# Altium PCB PCB.PcbDoc (part 2 of 2)
Units mm, origin at the board's own origin, x right, y up, seen from the top; angles counter-clockwise.
Board outline 181 x 108 mm, 2 copper layers (Top Layer, Bottom Layer), stack 1.571 mm thick; 37 components, 127 nets, 780 pads, 76 vias.
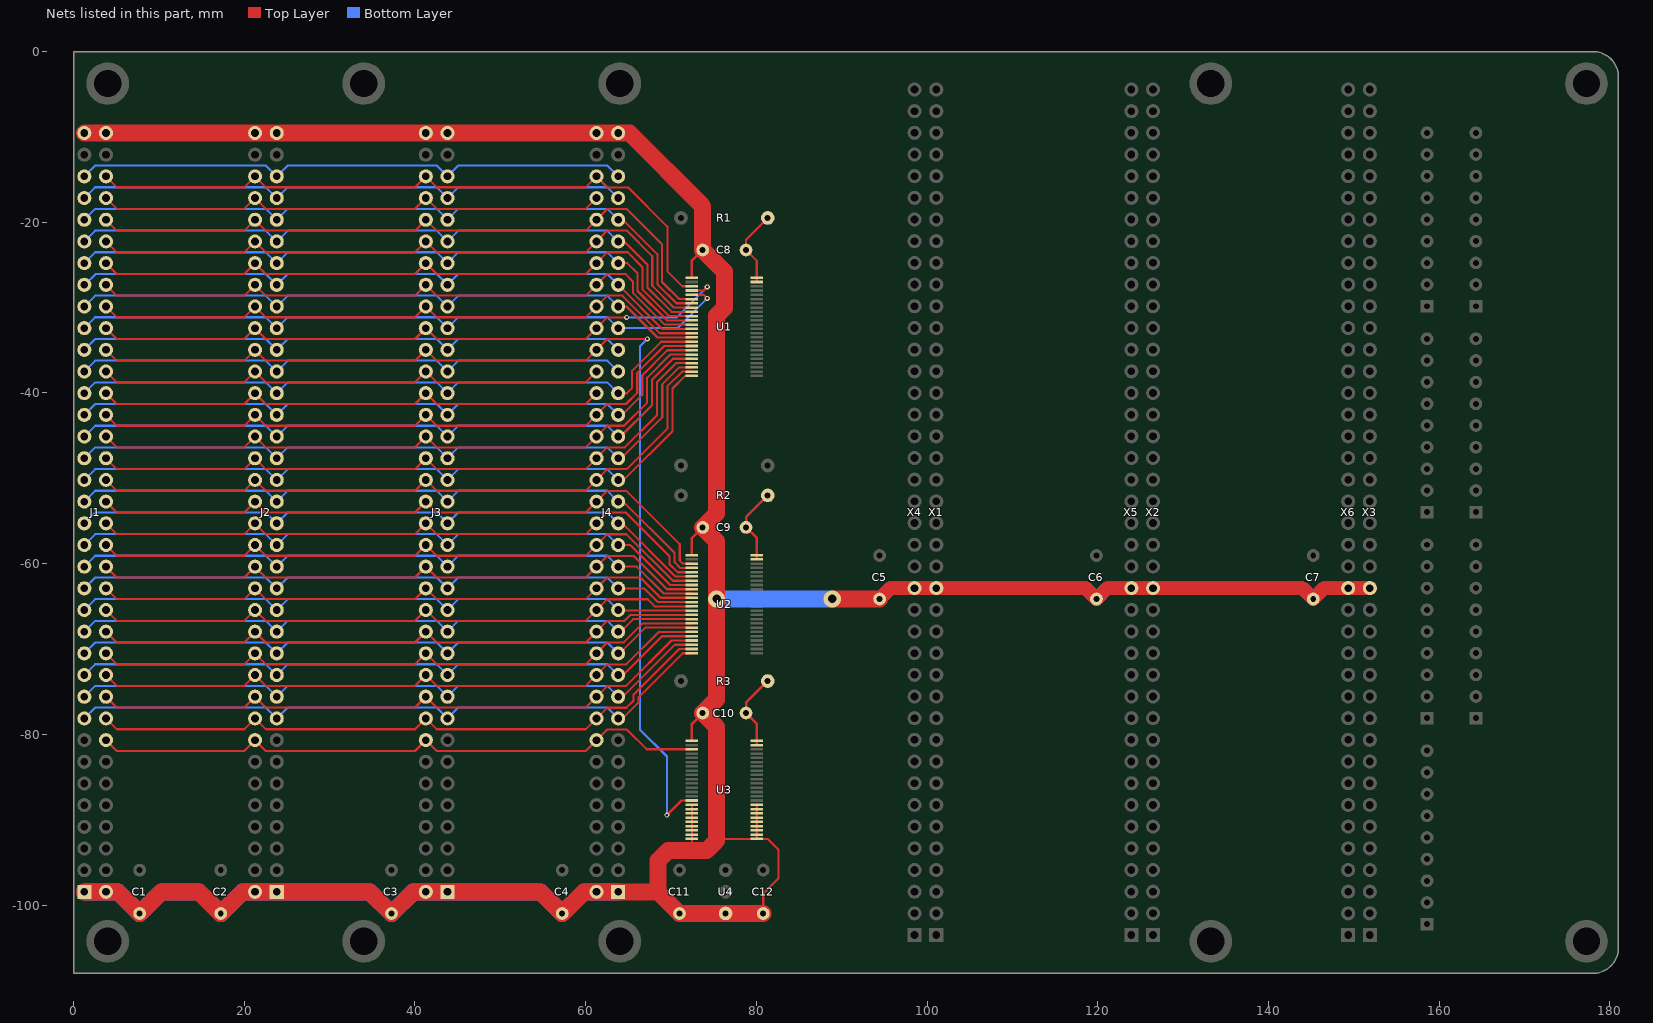
[diagram p2: the nets of this part, all layers, seen from the top]

## Via types
v1: diameter 0.6, hole 0.3, Top Layer to Bottom Layer, tented both sides, 73 vias
v2: diameter 2, hole 1, Top Layer to Bottom Layer, tented both sides, 3 vias

## Nets (pads, with @x,y where several pads share a name; then routed paths per layer and width w, separated by ;. In a path a pad name is that pad's centre, name@x,y a point inside that pad or via, vN(x,y) a via of type N, cw(c..) or ccw(c..) an arc to the next point about the centre after c; other vN are vias at no path point) (continued)
A11: J1.16 J2.16 J3.16 J4.16 U3.3 | length 73.3
  Top Layer w0.25: J1.16@3.81,-80.67 5.08,-81.94 20,-81.94 J2.16@21.27,-80.67 22.54,-81.94 40,-81.94 J3.16@41.27,-80.67 42.54,-81.94 60,-81.94 J4.16@61.27,-80.67 62.515,-79.425 64.825,-79.425 67.15,-81.75 U3.3@72.45,-81.75
A12: J1.17 J2.17 J3.17 J4.17 U2.24 | length 77.8
  Top Layer w0.25: J4.17@63.81,-78.13 64.345,-78.13 66.225,-76.25 66.225,-75.65 71.375,-70.5 U2.24@72.45,-70.5
  Bottom Layer w0.25: J1.17@1.27,-78.13 2.54,-76.86 22.54,-76.86 J2.17@23.81,-78.13 25.08,-76.86 42.54,-76.86 J3.17@43.81,-78.13 45.08,-76.86 62.54,-76.86 J4.17@63.81,-78.13
A13: J1.18 J2.18 J3.18 J4.18 U2.23 | length 75.6
  Top Layer w0.25: J1.18@3.81,-78.13 5.08,-79.4 20,-79.4 J2.18@21.27,-78.13 22.54,-79.4 40,-79.4 J3.18@41.27,-78.13 42.54,-79.4 60,-79.4 J4.18@61.27,-78.13 62.525,-76.875 64.775,-76.875 65.625,-76.025 65.625,-75.325 70.95,-70 U2.23@72.45,-70
A14: J1.19 J2.19 J3.19 J4.19 U2.22 | length 76.9
  Top Layer w0.25: J4.19@63.81,-75.59 64.36,-75.59 70.45,-69.5 U2.22@72.45,-69.5
  Bottom Layer w0.25: J1.19@1.27,-75.59 2.54,-74.32 22.54,-74.32 J2.19@23.81,-75.59 25.08,-74.32 42.54,-74.32 J3.19@43.81,-75.59 45.08,-74.32 62.54,-74.32 J4.19@63.81,-75.59
A15: J1.20 J2.20 J3.20 J4.20 U2.21 | length 74.5
  Top Layer w0.25: J1.20@3.81,-75.59 5.08,-76.86 20,-76.86 J2.20@21.27,-75.59 22.54,-76.86 40,-76.86 J3.20@41.27,-75.59 42.54,-76.86 60,-76.86 J4.20@61.27,-75.59 62.51,-74.35 64.7,-74.35 70.05,-69 U2.21@72.45,-69
A16: J1.21 J2.21 J3.21 J4.21 U2.20 | length 76.2
  Top Layer w0.25: J4.21@63.81,-73.05 64.4,-73.05 68.95,-68.5 U2.20@72.45,-68.5
  Bottom Layer w0.25: J1.21@1.27,-73.05 2.54,-71.78 22.54,-71.78 J2.21@23.81,-73.05 25.08,-71.78 42.54,-71.78 J3.21@43.81,-73.05 45.08,-71.78 62.54,-71.78 J4.21@63.81,-73.05
A17: J1.22 J2.22 J3.22 J4.22 U2.19 | length 73.9
  Top Layer w0.25: J1.22@3.81,-73.05 5.08,-74.32 20,-74.32 J2.22@21.27,-73.05 22.54,-74.32 40,-74.32 J3.22@41.27,-73.05 42.54,-74.32 60,-74.32 J4.22@61.27,-73.05 62.52,-71.8 64.775,-71.8 68.575,-68 U2.19@72.45,-68
A18: J1.23 J2.23 J3.23 J4.23 U2.18 | length 75.6
  Top Layer w0.25: J4.23@63.81,-70.51 63.99,-70.51 67,-67.5 U2.18@72.45,-67.5
  Bottom Layer w0.25: J1.23@1.27,-70.51 2.54,-69.24 22.54,-69.24 J2.23@23.81,-70.51 25.08,-69.24 42.54,-69.24 J3.23@43.81,-70.51 45.08,-69.24 62.54,-69.24 J4.23@63.81,-70.51
A19: J1.24 J2.24 J3.24 J4.24 U2.17 | length 73.3
  Top Layer w0.25: J1.24@3.81,-70.51 5.08,-71.78 20,-71.78 J2.24@21.27,-70.51 22.54,-71.78 40,-71.78 J3.24@41.27,-70.51 42.54,-71.78 60,-71.78 J4.24@61.27,-70.51 62.555,-69.225 64.475,-69.225 66.7,-67 U2.17@72.45,-67
A20: J1.25 J2.25 J3.25 J4.25 U2.16 | length 74.9
  Top Layer w0.25: J4.25@63.81,-67.97 64.105,-67.97 65.575,-66.5 U2.16@72.45,-66.5
  Bottom Layer w0.25: J1.25@1.27,-67.97 2.54,-66.7 22.54,-66.7 J2.25@23.81,-67.97 25.08,-66.7 42.54,-66.7 J3.25@43.81,-67.97 45.08,-66.7 62.54,-66.7 J4.25@63.81,-67.97
A21: J1.26 J2.26 J3.26 J4.26 U2.15 | length 72.6
  Top Layer w0.25: J1.26@3.81,-67.97 5.08,-69.24 20,-69.24 J2.26@21.27,-67.97 22.54,-69.24 40,-69.24 J3.26@41.27,-67.97 42.54,-69.24 60,-69.24 J4.26@61.27,-67.97 62.54,-66.7 64.55,-66.7 65.25,-66 U2.15@72.45,-66
A22: J1.27 J2.27 J3.27 J4.27 U2.14 | length 74.4
  Top Layer w0.25: J4.27@63.81,-65.43 63.88,-65.5 U2.14@72.45,-65.5
  Bottom Layer w0.25: J1.27@1.27,-65.43 2.54,-64.16 22.54,-64.16 J2.27@23.81,-65.43 25.08,-64.16 42.54,-64.16 J3.27@43.81,-65.43 45.08,-64.16 62.54,-64.16 J4.27@63.81,-65.43
A23: J1.28 J2.28 J3.28 J4.28 U2.13 | length 72.7
  Top Layer w0.25: J1.28@3.81,-65.43 5.08,-66.7 20,-66.7 J2.28@21.27,-65.43 22.54,-66.7 40,-66.7 J3.28@41.27,-65.43 42.54,-66.7 60,-66.7 J4.28@61.27,-65.43 62.525,-64.175 67.275,-64.175 68.1,-65 U2.13@72.45,-65
BACK#: J1.35 J2.35 J3.35 J4.35 U2.6 | length 76.9
  Top Layer w0.25: J4.35@63.81,-55.27 64.27,-55.27 70.5,-61.5 U2.6@72.45,-61.5
  Bottom Layer w0.25: J1.35@1.27,-55.27 2.54,-54 22.54,-54 J2.35@23.81,-55.27 25.08,-54 42.54,-54 J3.35@43.81,-55.27 45.08,-54 62.54,-54 J4.35@63.81,-55.27
BREQ#: J1.36 J2.36 J3.36 J4.36 U2.5 | length 75.7
  Top Layer w0.25: J1.36@3.81,-55.27 5.08,-56.54 20,-56.54 J2.36@21.27,-55.27 22.54,-56.54 40,-56.54 J3.36@41.27,-55.27 42.54,-56.54 60,-56.54 J4.36@61.27,-55.27 62.515,-54.025 64.725,-54.025 69.825,-59.125 69.825,-60.05 70.775,-61 U2.5@72.45,-61
CS0#: J1.48 J2.48 J3.48 J4.48 | length 60.6
  Top Layer w0.25: J1.48@3.81,-40.03 5.08,-41.3 20,-41.3 J2.48@21.27,-40.03 22.54,-41.3 40,-41.3 J3.48@41.27,-40.03 42.54,-41.3 60,-41.3 J4.48@61.27,-40.03
CS1#: J1.49 J2.49 J3.49 J4.49 | length 65.7
  Bottom Layer w0.25: J1.49@1.27,-37.49 2.54,-36.22 22.54,-36.22 J2.49@23.81,-37.49 25.08,-36.22 42.54,-36.22 J3.49@43.81,-37.49 45.08,-36.22 62.54,-36.22 J4.49@63.81,-37.49
CS2#: J1.50 J2.50 J3.50 J4.50 | length 60.6
  Top Layer w0.25: J1.50@3.81,-37.49 5.08,-38.76 20,-38.76 J2.50@21.27,-37.49 22.54,-38.76 40,-38.76 J3.50@41.27,-37.49 42.54,-38.76 60,-38.76 J4.50@61.27,-37.49
CS3#: J1.51 J2.51 J3.51 J4.51 | length 65.7
  Bottom Layer w0.25: J1.51@1.27,-34.95 2.54,-33.68 22.54,-33.68 J2.51@23.81,-34.95 25.08,-33.68 42.54,-33.68 J3.51@43.81,-34.95 45.08,-33.68 62.54,-33.68 J4.51@63.81,-34.95
D0: J1.40 J2.40 J3.40 J4.40 U1.23 | length 80
  Top Layer w0.25: J1.40@3.81,-50.19 5.08,-51.46 20,-51.46 J2.40@21.27,-50.19 22.54,-51.46 40,-51.46 J3.40@41.27,-50.19 42.54,-51.46 60,-51.46 J4.40@61.27,-50.19 62.535,-48.925 64.825,-48.925 69.575,-44.175 69.575,-39.225 71.3,-37.5 U1.23@72.45,-37.5
D1: J1.41 J2.41 J3.41 J4.41 U1.22 | length 81
  Top Layer w0.25: J4.41@63.81,-47.65 64.175,-47.65 68.975,-42.85 68.975,-39 70.975,-37 U1.22@72.45,-37
  Bottom Layer w0.25: J1.41@1.27,-47.65 2.54,-46.38 22.54,-46.38 J2.41@23.81,-47.65 25.08,-46.38 42.54,-46.38 J3.41@43.81,-47.65 45.08,-46.38 62.54,-46.38 J4.41@63.81,-47.65
D2: J1.42 J2.42 J3.42 J4.42 U1.21 | length 78.7
  Top Layer w0.25: J1.42@3.81,-47.65 5.08,-48.92 20,-48.92 J2.42@21.27,-47.65 22.54,-48.92 40,-48.92 J3.42@41.27,-47.65 42.54,-48.92 60,-48.92 J4.42@61.27,-47.65 62.545,-46.375 64.575,-46.375 68.375,-42.575 68.375,-38.725 70.6,-36.5 U1.21@72.45,-36.5
D3: J1.43 J2.43 J3.43 J4.43 U1.20 | length 79.9
  Top Layer w0.25: J4.43@63.81,-45.11 64.09,-45.11 67.775,-41.425 67.775,-38.45 70.225,-36 U1.20@72.45,-36
  Bottom Layer w0.25: J1.43@1.27,-45.11 2.54,-43.84 22.54,-43.84 J2.43@23.81,-45.11 25.08,-43.84 42.54,-43.84 J3.43@43.81,-45.11 45.08,-43.84 62.54,-43.84 J4.43@63.81,-45.11
D4: J1.44 J2.44 J3.44 J4.44 U1.19 | length 77.5
  Top Layer w0.25: J1.44@3.81,-45.11 5.08,-46.38 20,-46.38 J2.44@21.27,-45.11 22.54,-46.38 40,-46.38 J3.44@41.27,-45.11 42.54,-46.38 60,-46.38 J4.44@61.27,-45.11 62.53,-43.85 64.5,-43.85 67.2,-41.15 67.2,-38.225 69.925,-35.5 U1.19@72.45,-35.5
D5: J1.45 J2.45 J3.45 J4.45 U1.18 | length 78.8
  Top Layer w0.25: J4.45@63.81,-42.57 64.28,-42.57 66.625,-40.225 66.625,-37.95 69.575,-35 U1.18@72.45,-35
  Bottom Layer w0.25: J1.45@1.27,-42.57 2.54,-41.3 22.54,-41.3 J2.45@23.81,-42.57 25.08,-41.3 42.54,-41.3 J3.45@43.81,-42.57 45.08,-41.3 62.54,-41.3 J4.45@63.81,-42.57
D6: J1.46 J2.46 J3.46 J4.46 U1.17 | length 76.5
  Top Layer w0.25: J1.46@3.81,-42.57 5.08,-43.84 20,-43.84 J2.46@21.27,-42.57 22.54,-43.84 40,-43.84 J3.46@41.27,-42.57 42.54,-43.84 60,-43.84 J4.46@61.27,-42.57 62.54,-41.3 64.725,-41.3 66.05,-39.975 66.05,-37.65 69.2,-34.5 U1.17@72.45,-34.5
D7: J1.47 J2.47 J3.47 J4.47 U1.16 | length 78
  Top Layer w0.25: J4.47@63.81,-40.03 64.82,-40.03 65.45,-39.4 65.45,-37.39 68.84,-34 U1.16@72.45,-34
  Bottom Layer w0.25: J1.47@1.27,-40.03 2.54,-38.76 22.54,-38.76 J2.47@23.81,-40.03 25.08,-38.76 42.54,-38.76 J3.47@43.81,-40.03 45.08,-38.76 62.54,-38.76 J4.47@63.81,-40.03
FCPU: J1.34 J2.34 J3.34 J4.34 U2.7 | length 74.6
  Top Layer w0.25: J1.34@3.81,-57.81 5.08,-59.08 20,-59.08 J2.34@21.27,-57.81 22.54,-59.08 40,-59.08 J3.34@41.27,-57.81 42.54,-59.08 60,-59.08 J4.34@61.27,-57.81 62.53,-56.55 64.775,-56.55 70.225,-62 U2.7@72.45,-62
GND: C1.2 C2.2 C3.2 C4.2 C5.1 C6.1 C7.1 C8.2 C9.2 C10.2 C11.2 C12.2 J1.1 J1.2 J1.71 J1.72 J2.1 J2.2 J2.71 J2.72 J3.1 J3.2 J3.71 J3.72 J4.1 J4.2 J4.71 J4.72 U1.1 U2.1 U3.1 U3.16 U3.17 U3.18 U3.19 U3.20 U3.21 U3.22 U3.23 U3.24 U3.25 U3.26 U3.27 U3.28 U3.29 U3.30 U3.31 U3.32 U3.33 U4.1 X1.17 X2.17 X3.17 X4.17 X5.17 X6.17 | length 564.3
  Top Layer w0.25: U3.16@72.45,-88.25 U3.17@72.45,-88.75 U3.18@72.45,-89.25 U3.19@72.45,-89.75 U3.20@72.45,-90.25 U3.21@72.45,-90.75 U3.22@72.45,-91.25 U3.23@72.45,-91.75 U3.24@72.45,-92.25 72.45,-93.525 72.525,-93.6 ; 75.325,-92.45 75.525,-92.25 U3.25@80.05,-92.25 ; U3.33@80.05,-88.25 U3.32@80.05,-88.75 U3.31@80.05,-89.25 U3.30@80.05,-89.75 U3.29@80.05,-90.25 U3.28@80.05,-90.75 U3.27@80.05,-91.25 U3.26@80.05,-91.75 U3.25@80.05,-92.25 ; C12.2@80.8,-100.98 80.8,-98.65 82.6,-96.85 82.6,-93.525 81.325,-92.25 U3.25@80.05,-92.25
  Top Layer w0.3: U3.1@72.45,-80.7 72.45,-78.76 C10.2@73.71,-77.5 ; U2.1@72.45,-58.95 72.45,-57.01 C9.2@73.71,-55.75 ; U1.1@72.45,-26.466 72.45,-24.51 C8.2@73.71,-23.25
  Top Layer w1.6: C5.1@94.44,-64.135 95.71,-62.865 X4.17@98.535,-62.865 X1.17@101.075,-62.865 118.57,-62.865 C6.1@119.84,-64.135 121.11,-62.865 X2.17@126.475,-62.865 143.97,-62.865 C7.1@145.24,-64.135 146.51,-62.865 X3.17@151.875,-62.865
  Top Layer w2: J1.1@1.27,-98.45 5.21,-98.45 C1.2@7.75,-100.99 10.29,-98.45 14.71,-98.45 C2.2@17.25,-100.99 19.79,-98.45 J2.2@21.27,-98.45 J2.1@23.81,-98.45 34.71,-98.45 C3.2@37.25,-100.99 39.79,-98.45 J3.2@41.27,-98.45 J3.1@43.81,-98.45 54.71,-98.45 C4.2@57.25,-100.99 59.79,-98.45 J4.2@61.27,-98.45 J4.1@63.81,-98.45 68.47,-98.45 ; J1.71@1.27,-9.55 J2.72@21.27,-9.55 J2.71@23.81,-9.55 J3.72@41.27,-9.55 J3.71@43.81,-9.55 J4.72@61.27,-9.55 J4.71@63.81,-9.55 65.125,-9.55 73.71,-18.135 C8.2@73.71,-23.25 76.25,-25.79 76.25,-30.025 75.325,-30.95 75.325,-54.135 C9.2@73.71,-55.75 75.325,-57.365 75.325,-75.885 C10.2@73.71,-77.5 75.325,-79.115 75.325,-92.45 74.175,-93.6 72.525,-93.6 69.675,-93.6 68.47,-94.805 68.47,-98.45 ; C12.2@80.8,-100.98 U4.1@76.4,-100.98 C11.2@71,-100.98 68.47,-98.45 ; v2(88.89,-64.135) C5.1@94.44,-64.135
  Bottom Layer w1: J1.71@1.27,-9.55 J2.72@21.27,-9.55 J2.71@23.81,-9.55 J3.72@41.27,-9.55 J3.71@43.81,-9.55 J4.72@61.27,-9.55 J4.71@63.81,-9.55
  Bottom Layer w1.6: C5.1@94.44,-64.135 95.71,-62.865 X1.17@101.075,-62.865 118.57,-62.865 C6.1@119.84,-64.135 121.11,-62.865 X2.17@126.475,-62.865 143.97,-62.865 C7.1@145.24,-64.135 146.51,-62.865 X3.17@151.875,-62.865
  Bottom Layer w2: J1.1@1.27,-98.45 5.21,-98.45 C1.2@7.75,-100.99 10.29,-98.45 14.71,-98.45 C2.2@17.25,-100.99 19.79,-98.45 J2.2@21.27,-98.45 J2.1@23.81,-98.45 34.71,-98.45 C3.2@37.25,-100.99 39.79,-98.45 J3.2@41.27,-98.45 J3.1@43.81,-98.45 54.71,-98.45 C4.2@57.25,-100.99 59.79,-98.45 J4.2@61.27,-98.45 J4.1@63.81,-98.45 ; v2(75.335,-64.135) v2(88.89,-64.135)
HALT#: J1.39 J2.39 J3.39 J4.39 U1.24 | length 82.3
  Top Layer w0.25: J4.39@63.81,-50.19 64.46,-50.19 70.175,-44.475 70.175,-39.475 71.65,-38 U1.24@72.45,-38
  Bottom Layer w0.25: J1.39@1.27,-50.19 2.54,-48.92 22.54,-48.92 J2.39@23.81,-50.19 25.08,-48.92 42.54,-48.92 J3.39@43.81,-50.19 45.08,-48.92 62.54,-48.92 J4.39@63.81,-50.19
INST#: J1.33 J2.33 J3.33 J4.33 U2.8 | length 76.3
  Top Layer w0.25: J4.33@63.81,-57.81 65.235,-57.81 69.925,-62.5 U2.8@72.45,-62.5
  Bottom Layer w0.25: J1.33@1.27,-57.81 2.54,-56.54 22.54,-56.54 J2.33@23.81,-57.81 25.08,-56.54 42.54,-56.54 J3.33@43.81,-57.81 45.08,-56.54 62.54,-56.54 J4.33@63.81,-57.81
IO#: J1.30 J2.30 J3.30 J4.30 U2.11 | length 73.3
  Top Layer w0.25: J1.30@3.81,-62.89 5.08,-64.16 20,-64.16 J2.30@21.27,-62.89 22.54,-64.16 40,-64.16 J3.30@41.27,-62.89 42.54,-64.16 60,-64.16 J4.30@61.27,-62.89 62.535,-61.625 66.4,-61.625 68.775,-64 U2.11@72.45,-64
MEM#: J1.29 J2.29 J3.29 J4.29 U2.12 | length 75
  Top Layer w0.25: J4.29@63.81,-62.89 66.84,-62.89 68.45,-64.5 U2.12@72.45,-64.5
  Bottom Layer w0.25: J1.29@1.27,-62.89 2.54,-61.62 22.54,-61.62 J2.29@23.81,-62.89 25.08,-61.62 42.54,-61.62 J3.29@43.81,-62.89 45.08,-61.62 62.54,-61.62 J4.29@63.81,-62.89
NetC8_1: C8.1 R1.2 U1.47 U1.48 | length 9.1
  Top Layer w0.25: U1.47@80.05,-27 U1.48@80.05,-26.5 80.05,-24.51 C8.1@78.79,-23.25 78.79,-22.04 R1.2@81.33,-19.5
NetC9_1: C9.1 R2.2 U2.47 U2.48 | length 9.1
  Top Layer w0.25: U2.47@80.05,-59.5 U2.48@80.05,-59
  Top Layer w0.3: U2.48@80.05,-59 80.05,-57.01 C9.1@78.79,-55.75 78.79,-54.54 R2.2@81.33,-52
NetC10_1: C10.1 R3.2 U3.47 U3.48 | length 9.1
  Top Layer w0.25: U3.47@80.05,-81.25 U3.48@80.05,-80.75
  Top Layer w0.3: U3.48@80.05,-80.75 80.05,-78.76 C10.1@78.79,-77.5 78.79,-76.29 R3.2@81.33,-73.75
NMI#: J1.38 J2.38 J3.38 J4.38 U2.3 | length 77
  Top Layer w0.25: J1.38@3.81,-52.73 5.08,-54 20,-54 J2.38@21.27,-52.73 22.54,-54 40,-54 J3.38@41.27,-52.73 42.54,-54 60,-54 J4.38@61.27,-52.73 62.525,-51.475 64.775,-51.475 71.025,-57.725 71.025,-59.65 71.375,-60 U2.3@72.45,-60
PB0: J1.52 J2.52 J3.52 J4.52 U3.15 | length 128.2
  Top Layer w0.25: J1.52@3.81,-34.95 5.08,-36.22 20,-36.22 J2.52@21.27,-34.95 22.54,-36.22 40,-36.22 J3.52@41.27,-34.95 42.54,-36.22 60,-36.22 J4.52@61.27,-34.95 62.545,-33.675 v1(67.225,-33.675) ; v1(69.525,-89.45) 71.225,-87.75 U3.15@72.45,-87.75
  Bottom Layer w0.25: v1(67.225,-33.675) 66.35,-34.55 66.35,-79.425 69.525,-82.6 v1(69.525,-89.45)
PB4: J1.53 J2.53 J3.53 J4.53 U1.5 | length 79.6
  Top Layer w0.25: U1.5@72.45,-28.5 73.825,-28.5 v1(74.25,-28.925)
  Bottom Layer w0.25: J1.53@1.27,-32.41 2.54,-31.14 22.54,-31.14 J2.53@23.81,-32.41 25.08,-31.14 42.54,-31.14 J3.53@43.81,-32.41 45.08,-31.14 62.54,-31.14 J4.53@63.81,-32.41 70.765,-32.41 v1(74.25,-28.925)
PB5: J1.54 J2.54 J3.54 J4.54 U1.4 | length 77.6
  Top Layer w0.25: J1.54@3.81,-32.41 5.08,-33.68 20,-33.68 J2.54@21.27,-32.41 22.54,-33.68 40,-33.68 J3.54@41.27,-32.41 42.54,-33.68 60,-33.68 J4.54@61.27,-32.41 62.53,-31.15 v1(64.8,-31.15) ; U1.4@72.45,-28 73.825,-28 v1(74.25,-27.575)
  Bottom Layer w0.25: v1(64.8,-31.15) 70.675,-31.15 v1(74.25,-27.575)
PC0: J1.55 J2.55 J3.55 J4.55 U1.15 | length 75.8
  Top Layer w0.25: J4.55@63.81,-29.87 64.785,-29.87 68.415,-33.5 U1.15@72.45,-33.5
  Bottom Layer w0.25: J1.55@1.27,-29.87 2.54,-28.6 22.54,-28.6 J2.55@23.81,-29.87 25.08,-28.6 42.54,-28.6 J3.55@43.81,-29.87 45.08,-28.6 62.54,-28.6 J4.55@63.81,-29.87
PC1: J1.56 J2.56 J3.56 J4.56 U1.14 | length 74.1
  Top Layer w0.25: J1.56@3.81,-29.87 5.08,-31.14 20,-31.14 J2.56@21.27,-29.87 22.54,-31.14 40,-31.14 J3.56@41.27,-29.87 42.54,-31.14 60,-31.14 J4.56@61.27,-29.87 62.54,-28.6 64.3,-28.6 68.7,-33 U1.14@72.45,-33
PD0: J1.57 J2.57 J3.57 J4.57 U1.13 | length 76.5
  Top Layer w0.25: J4.57@63.81,-27.33 68.98,-32.5 U1.13@72.45,-32.5
  Bottom Layer w0.25: J1.57@1.25,-27.4 2.59,-26.06 22.54,-26.06 J2.57@23.81,-27.33 25.08,-26.06 42.54,-26.06 J3.57@43.81,-27.33 45.08,-26.06 62.54,-26.06 J4.57@63.81,-27.33
PD1: J1.58 J2.58 J3.58 J4.58 U1.12 | length 75.6
  Top Layer w0.25: J1.58@3.81,-27.33 5.08,-28.6 20,-28.6 J2.58@21.27,-27.33 22.54,-28.6 40,-28.6 J3.58@41.27,-27.33 42.54,-28.6 60,-28.6 J4.58@61.27,-27.33 62.55,-26.05 64.625,-26.05 65.525,-26.95 65.525,-28.25 69.275,-32 U1.12@72.45,-32
PD2: J1.59 J2.59 J3.59 J4.59 U1.11 | length 78.3
  Top Layer w0.25: J4.59@63.81,-24.79 64.89,-24.79 66.075,-25.975 66.075,-28.05 69.525,-31.5 U1.11@72.45,-31.5
  Bottom Layer w0.25: J1.59@1.27,-24.79 2.54,-23.52 22.54,-23.52 J2.59@23.81,-24.79 25.08,-23.52 42.54,-23.52 J3.59@43.81,-24.79 45.08,-23.52 62.54,-23.52 J4.59@63.81,-24.79
PD3: J1.60 J2.60 J3.60 J4.60 U1.10 | length 76.9
  Top Layer w0.25: J1.60@3.81,-24.79 5.08,-26.06 20,-26.06 J2.60@21.27,-24.79 22.54,-26.06 40,-26.06 J3.60@41.27,-24.79 42.54,-26.06 60,-26.06 J4.60@61.27,-24.79 62.535,-23.525 64.925,-23.525 66.65,-25.25 66.65,-27.85 69.8,-31 U1.10@72.45,-31
PD4: J1.61 J2.61 J3.61 J4.61 U1.9 | length 79.3
  Top Layer w0.25: J4.61@63.81,-22.25 64.525,-22.25 67.225,-24.95 67.225,-27.65 70.075,-30.5 U1.9@72.45,-30.5
  Bottom Layer w0.25: J1.61@1.27,-22.25 2.54,-20.98 22.54,-20.98 J2.61@23.81,-22.25 25.08,-20.98 42.54,-20.98 J3.61@43.81,-22.25 45.08,-20.98 62.54,-20.98 J4.61@63.81,-22.25
PD5: J1.62 J2.62 J3.62 J4.62 U1.8 | length 78.1
  Top Layer w0.25: J1.62@3.81,-22.25 5.08,-23.52 20,-23.52 J2.62@21.27,-22.25 22.54,-23.52 40,-23.52 J3.62@41.27,-22.25 42.54,-23.52 60,-23.52 J4.62@61.27,-22.25 62.545,-20.975 64.8,-20.975 67.8,-23.975 67.8,-27.45 70.35,-30 U1.8@72.45,-30
PD6: J1.63 J2.63 J3.63 J4.63 U1.7 | length 80.4
  Top Layer w0.25: J4.63@63.81,-19.71 64.36,-19.71 68.4,-23.75 68.4,-27.25 70.65,-29.5 U1.7@72.45,-29.5
  Bottom Layer w0.25: J1.63@1.27,-19.71 2.54,-18.44 22.54,-18.44 J2.63@23.81,-19.71 25.08,-18.44 42.54,-18.44 J3.63@43.81,-19.71 45.08,-18.44 62.54,-18.44 J4.63@63.81,-19.71
PD7: J1.64 J2.64 J3.64 J4.64 U1.6 | length 79.3
  Top Layer w0.25: J1.64@3.81,-19.71 5.08,-20.98 20,-20.98 J2.64@21.27,-19.71 22.54,-20.98 40,-20.98 J3.64@41.27,-19.71 42.54,-20.98 60,-20.98 J4.64@61.27,-19.71 62.53,-18.45 64.825,-18.45 68.95,-22.575 68.95,-27 70.95,-29 U1.6@72.45,-29
RD#: J1.31 J2.31 J3.31 J4.31 U2.10 | length 75.6
  Top Layer w0.25: J4.31@63.81,-60.35 66,-60.35 69.15,-63.5 U2.10@72.45,-63.5
  Bottom Layer w0.25: J1.31@1.27,-60.35 2.54,-59.08 22.54,-59.08 J2.31@23.81,-60.35 25.08,-59.08 42.54,-59.08 J3.31@43.81,-60.35 45.08,-59.08 62.54,-59.08 J4.31@63.81,-60.35
RST#: J1.68 J2.68 J3.68 J4.68 U1.3 | length 80.2
  Top Layer w0.25: J1.68@3.81,-14.63 5.08,-15.9 20,-15.9 J2.68@21.27,-14.63 22.54,-15.9 40,-15.9 J3.68@41.27,-14.63 42.54,-15.9 60,-15.9 J4.68@61.27,-14.63 62.565,-15.925 64.975,-15.925 69.575,-20.525 69.575,-25.75 71.325,-27.5 U1.3@72.45,-27.5
SCL: J1.65 J2.65 J3.65 J4.65 | length 65.7
  Bottom Layer w0.25: J1.65@1.27,-17.17 2.54,-15.9 22.54,-15.9 J2.65@23.81,-17.17 25.08,-15.9 42.54,-15.9 J3.65@43.81,-17.17 45.08,-15.9 62.54,-15.9 J4.65@63.81,-17.17
SDA: J1.66 J2.66 J3.66 J4.66 | length 60.6
  Top Layer w0.25: J1.66@3.81,-17.17 5.08,-18.44 20,-18.44 J2.66@21.27,-17.17 22.54,-18.44 40,-18.44 J3.66@41.27,-17.17 42.54,-18.44 60,-18.44 J4.66@61.27,-17.17
SND: J1.67 J2.67 J3.67 J4.67 | length 65.7
  Bottom Layer w0.25: J1.67@1.27,-14.63 2.54,-13.36 22.54,-13.36 J2.67@23.81,-14.63 25.08,-13.36 42.54,-13.36 J3.67@43.81,-14.63 45.08,-13.36 62.54,-13.36 J4.67@63.81,-14.63
WAIT#: J1.37 J2.37 J3.37 J4.37 U2.4 | length 78.2
  Top Layer w0.25: J4.37@63.81,-52.73 64.405,-52.73 70.425,-58.75 70.425,-59.85 71.075,-60.5 U2.4@72.45,-60.5
  Bottom Layer w0.25: J1.37@1.27,-52.73 2.54,-51.46 22.54,-51.46 J2.37@23.81,-52.73 25.08,-51.46 42.54,-51.46 J3.37@43.81,-52.73 45.08,-51.46 62.54,-51.46 J4.37@63.81,-52.73
WR#: J1.32 J2.32 J3.32 J4.32 U2.9 | length 73.9
  Top Layer w0.25: J1.32@3.81,-60.35 5.08,-61.62 20,-61.62 J2.32@21.27,-60.35 22.54,-61.62 40,-61.62 J3.32@41.27,-60.35 42.54,-61.62 60,-61.62 J4.32@61.27,-60.35 62.52,-59.1 65.625,-59.1 69.525,-63 U2.9@72.45,-63
pads on no net: J1.69 J1.70 J2.69 J2.70 J3.69 J3.70 J4.69 J4.70 X4.1 X4.2 X4.3 X4.4 X4.5 X4.6 X4.7 X4.8 X4.19 X4.27 X4.28 X4.29 X4.30 X4.31 X4.32 X4.33 X4.34 X5.1 X5.2 X5.3 X5.4 X5.5 X5.6 X5.7 X5.8 X5.19 X5.27 X5.28 X5.29 X5.30 X5.31 X5.32 X5.33 X5.34 X6.1 X6.2 X6.3 X6.4 X6.5 X6.6 X6.7 X6.8 X6.19 X6.27 X6.28 X6.29 X6.30 X6.31 X6.32 X6.33 X6.34

## Silkscreen, mask and mechanical layers (free items; w line width, h text height)
Top Overlay:
  circle w0.75: c1.54,-101 r0.35
  circle w0.75: c151.855,-106.055 r0.35
  circle w0.75: c126.455,-106.055 r0.35
  circle w0.75: c101.055,-106.055 r0.35
  circle w0.75: c23.54,-101 r0.35
  circle w0.75: c43.54,-101 r0.35
  circle w0.75: c63.54,-101 r0.35
  text "Z20X-RC2014 EXPANDER / R2 (C) KnivD, 2020" at 7.046,-4.216 h2.2
  text "SP8" at 94.059,-4.953 h1.6
  text "SP4" at 102.853,-4.953 h1.6
  text "SP8" at 119.459,-4.953 h1.6
  text "SP4" at 128.253,-4.953 h1.6
  text "SP8" at 144.859,-4.953 h1.6
  text "SP4" at 153.653,-4.953 h1.6
  text "SP7" at 93.995,-7.747 h1.6
  text "SP3" at 102.853,-7.747 h1.6
  text "SP7" at 119.395,-7.747 h1.6
  text "SP3" at 128.253,-7.747 h1.6
  text "SP7" at 144.795,-7.747 h1.6
  text "SP3" at 153.653,-7.747 h1.6
  text "SP6" at 93.951,-10.033 h1.6
  text "SP2" at 102.853,-10.033 h1.6
  text "SP6" at 119.351,-10.033 h1.6
  text "SP2" at 128.253,-10.033 h1.6
  text "SP6" at 144.751,-10.033 h1.6
  text "SP2" at 153.653,-10.033 h1.6
  text "GND" at 16.444,-10.058 h1.6
  text "GND" at 25.588,-10.058 h1.6
  text "GND" at 36.444,-10.058 h1.6
  text "GND" at 45.588,-10.058 h1.6
  text "GND" at 56.444,-10.058 h1.6
  text "GND" at 65.588,-10.058 h1.6
  text "*" at 26.574,-10.957 h2.5 r180
  text "*" at 46.574,-10.957 h2.5 r180
  text "*" at 66.574,-10.957 h2.5 r180
  text "SP5" at 93.909,-12.573 h1.6
  text "SP1" at 102.853,-12.573 h1.6
  text "SP5" at 119.309,-12.573 h1.6
  text "SP1" at 128.253,-12.573 h1.6
  text "SP5" at 144.709,-12.573 h1.6
  text "SP1" at 153.653,-12.573 h1.6
  text "*" at 18.506,-13.223 h2.5
  text "*" at 38.506,-13.223 h2.5
  text "*" at 58.506,-13.223 h2.5
  text "RX2" at 93.963,-15.113 h1.6
  text "RX1" at 102.853,-15.113 h1.6
  text "RX2" at 119.363,-15.113 h1.6
  text "RX1" at 128.253,-15.113 h1.6
  text "RX2" at 144.763,-15.113 h1.6
  text "RX1" at 153.653,-15.113 h1.6
  text "RST#" at 15.936,-15.138 h1.6
  text "SND" at 25.588,-15.138 h1.6
  text "RST#" at 35.936,-15.138 h1.6
  text "SND" at 45.588,-15.138 h1.6
  text "RST#" at 55.936,-15.138 h1.6
  text "SND" at 65.588,-15.138 h1.6
  text "TX2" at 93.963,-17.653 h1.6
  text "TX1" at 102.853,-17.653 h1.6
  text "TX2" at 119.363,-17.653 h1.6
  text "TX1" at 128.253,-17.653 h1.6
  text "TX2" at 144.763,-17.653 h1.6
  text "TX1" at 153.653,-17.653 h1.6
  text "SDA" at 16.444,-17.678 h1.6
  text "SCL" at 25.588,-17.678 h1.6
  text "SDA" at 36.444,-17.678 h1.6
  text "SCL" at 45.588,-17.678 h1.6
  text "SDA" at 56.444,-17.678 h1.6
  text "SCL" at 65.588,-17.678 h1.6
  text "D7" at 102.853,-20.193 h1.6
  text "D7" at 128.253,-20.193 h1.6
  text "D7" at 153.653,-20.193 h1.6
  text "PD7" at 16.698,-20.218 h1.6
  text "PD6" at 25.588,-20.218 h1.6
  text "PD7" at 36.698,-20.218 h1.6
  text "PD6" at 45.588,-20.218 h1.6
  text "PD7" at 56.698,-20.218 h1.6
  text "PD6" at 65.588,-20.218 h1.6
  text "*" at 95.771,-20.818 h2.5
  text "*" at 121.171,-20.818 h2.5
  text "*" at 146.571,-20.818 h2.5
  text "D6" at 102.853,-22.733 h1.6
  text "D6" at 128.253,-22.733 h1.6
  text "D6" at 153.653,-22.733 h1.6
  text "PD5" at 16.698,-22.758 h1.6
  text "PD4" at 25.588,-22.758 h1.6
  text "PD5" at 36.698,-22.758 h1.6
  text "PD4" at 45.588,-22.758 h1.6
  text "PD5" at 56.698,-22.758 h1.6
  text "PD4" at 65.588,-22.758 h1.6
  text "*" at 95.771,-23.358 h2.5
  text "*" at 121.171,-23.358 h2.5
  text "*" at 146.571,-23.358 h2.5
  text "D5" at 102.853,-25.273 h1.6
  text "D5" at 128.253,-25.273 h1.6
  text "D5" at 153.653,-25.273 h1.6
  text "PD3" at 16.698,-25.298 h1.6
  text "PD2" at 25.588,-25.298 h1.6
  text "PD3" at 36.698,-25.298 h1.6
  text "PD2" at 45.588,-25.298 h1.6
  text "PD3" at 56.698,-25.298 h1.6
  text "PD2" at 65.588,-25.298 h1.6
  text "*" at 95.771,-25.898 h2.5
  text "*" at 121.171,-25.898 h2.5
  text "*" at 146.571,-25.898 h2.5
  text "D4" at 102.853,-27.813 h1.6
  text "D4" at 128.253,-27.813 h1.6
  text "D4" at 153.653,-27.813 h1.6
  text "PD1" at 16.698,-27.838 h1.6
  text "PD0" at 25.588,-27.838 h1.6
  text "PD1" at 36.698,-27.838 h1.6
  text "PD0" at 45.588,-27.838 h1.6
  text "PD1" at 56.698,-27.838 h1.6
  text "PD0" at 65.588,-27.838 h1.6
  text "*" at 95.771,-28.438 h2.5
  text "*" at 121.171,-28.438 h2.5
  text "*" at 146.571,-28.438 h2.5
  text "D3" at 102.853,-30.353 h1.6
  text "D3" at 128.253,-30.353 h1.6
  text "D3" at 153.653,-30.353 h1.6
  text "PC1" at 16.698,-30.378 h1.6
  text "PC0" at 25.588,-30.378 h1.6
  text "PC1" at 36.698,-30.378 h1.6
  text "PC0" at 45.588,-30.378 h1.6
  text "PC1" at 56.698,-30.378 h1.6
  text "PC0" at 65.588,-30.378 h1.6
  text "*" at 95.771,-30.978 h2.5
  text "*" at 121.171,-30.978 h2.5
  text "*" at 146.571,-30.978 h2.5
  text "D2" at 102.853,-32.893 h1.6
  text "D2" at 128.253,-32.893 h1.6
  text "D2" at 153.653,-32.893 h1.6
  text "PB5" at 16.698,-32.918 h1.6
  text "PB4" at 25.588,-32.918 h1.6
  text "PB5" at 36.698,-32.918 h1.6
  text "PB4" at 45.588,-32.918 h1.6
  text "PB5" at 56.698,-32.918 h1.6
  text "PB4" at 65.588,-32.918 h1.6
  text "*" at 95.771,-33.518 h2.5
  text "*" at 121.171,-33.518 h2.5
  text "*" at 146.571,-33.518 h2.5
  text "D1" at 102.853,-35.433 h1.6
  text "D1" at 128.253,-35.433 h1.6
  text "D1" at 153.653,-35.433 h1.6
  text "PB0" at 16.698,-35.458 h1.6
  text "CS3#" at 25.588,-35.458 h1.6
  text "PB0" at 36.698,-35.458 h1.6
  text "CS3#" at 45.588,-35.458 h1.6
  text "PB0" at 56.698,-35.458 h1.6
  text "CS3#" at 65.588,-35.458 h1.6
  text "*" at 95.771,-36.058 h2.5
  text "*" at 121.171,-36.058 h2.5
  text "*" at 146.571,-36.058 h2.5
  text "D0" at 102.853,-37.973 h1.6
  text "D0" at 128.253,-37.973 h1.6
  text "D0" at 153.653,-37.973 h1.6
  text "CS2#" at 15.936,-37.998 h1.6
  text "CS1#" at 25.588,-37.998 h1.6
  text "CS2#" at 35.936,-37.998 h1.6
  text "CS1#" at 45.588,-37.998 h1.6
  text "CS2#" at 55.936,-37.998 h1.6
  text "CS1#" at 65.588,-37.998 h1.6
  text "*" at 95.771,-38.598 h2.5
  text "*" at 121.171,-38.598 h2.5
  text "*" at 146.571,-38.598 h2.5
  text "NMI#" at 93.379,-40.513 h1.6
  text "IO#" at 102.853,-40.513 h1.6
  text "NMI#" at 118.779,-40.513 h1.6
  text "IO#" at 128.253,-40.513 h1.6
  text "NMI#" at 144.179,-40.513 h1.6
  text "IO#" at 153.653,-40.513 h1.6
  text "CS0#" at 15.936,-40.538 h1.6
  text "D7" at 25.588,-40.538 h1.6
  text "CS0#" at 35.936,-40.538 h1.6
  text "D7" at 45.588,-40.538 h1.6
  text "CS0#" at 55.936,-40.538 h1.6
  text "D7" at 65.588,-40.538 h1.6
  text "WAIT#" at 92.229,-43.053 h1.6
  text "RD#" at 102.853,-43.053 h1.6
  text "WAIT#" at 117.629,-43.053 h1.6
  text "RD#" at 128.253,-43.053 h1.6
  text "WAIT#" at 143.029,-43.053 h1.6
  text "RD#" at 153.653,-43.053 h1.6
  text "D6" at 17.714,-43.078 h1.6
  text "D5" at 25.588,-43.078 h1.6
  text "D6" at 37.714,-43.078 h1.6
  text "D5" at 45.588,-43.078 h1.6
  text "D6" at 57.714,-43.078 h1.6
  text "D5" at 65.588,-43.078 h1.6
  text "BREQ#" at 91.879,-45.593 h1.6
  text "WR#" at 102.853,-45.593 h1.6
  text "BREQ#" at 117.279,-45.593 h1.6
  text "WR#" at 128.253,-45.593 h1.6
  text "BREQ#" at 142.679,-45.593 h1.6
  text "WR#" at 153.653,-45.593 h1.6
  text "D4" at 17.714,-45.618 h1.6
  text "D3" at 25.588,-45.618 h1.6
  text "D4" at 37.714,-45.618 h1.6
  text "D3" at 45.588,-45.618 h1.6
  text "D4" at 57.714,-45.618 h1.6
  text "D3" at 65.588,-45.618 h1.6
  text "HALT#" at 92.205,-48.133 h1.6
  text "MEM#" at 102.853,-48.133 h1.6
  text "HALT#" at 117.605,-48.133 h1.6
  text "MEM#" at 128.253,-48.133 h1.6
  text "HALT#" at 143.005,-48.133 h1.6
  text "MEM#" at 153.653,-48.133 h1.6
  text "D2" at 17.714,-48.158 h1.6
  text "D1" at 25.588,-48.158 h1.6
  text "D2" at 37.714,-48.158 h1.6
  text "D1" at 45.588,-48.158 h1.6
  text "D2" at 57.714,-48.158 h1.6
  text "D1" at 65.588,-48.158 h1.6
  text "BACK#" at 91.931,-50.673 h1.6
  text "INT#" at 102.853,-50.673 h1.6
  text "BACK#" at 117.331,-50.673 h1.6
  text "INT#" at 128.253,-50.673 h1.6
  text "BACK#" at 142.731,-50.673 h1.6
  text "INT#" at 153.653,-50.673 h1.6
  text "D0" at 17.714,-50.698 h1.6
  text "HALT#" at 25.588,-50.698 h1.6
  text "D0" at 37.714,-50.698 h1.6
  text "HALT#" at 45.588,-50.698 h1.6
  text "D0" at 57.714,-50.698 h1.6
  text "HALT#" at 65.588,-50.698 h1.6
  text "CLK" at 93.697,-53.213 h1.6
  text "CLK" at 102.853,-53.213 h1.6
  text "CLK" at 119.097,-53.213 h1.6
  text "CLK" at 128.253,-53.213 h1.6
  text "CLK" at 144.497,-53.213 h1.6
  text "CLK" at 153.653,-53.213 h1.6
  text "NMI#" at 16.19,-53.238 h1.6
  text "WAIT#" at 25.588,-53.238 h1.6
  text "NMI#" at 36.19,-53.238 h1.6
  text "WAIT#" at 45.588,-53.238 h1.6
  text "NMI#" at 56.19,-53.238 h1.6
  text "WAIT#" at 65.588,-53.238 h1.6
  text "RST#" at 93.155,-55.753 h1.6
  text "RST#" at 102.853,-55.753 h1.6
  text "RST#" at 118.555,-55.753 h1.6
  text "RST#" at 128.253,-55.753 h1.6
  text "RST#" at 143.955,-55.753 h1.6
  text "RST#" at 153.653,-55.753 h1.6
  text "BREQ#" at 14.666,-55.778 h1.6
  text "BACK#" at 25.588,-55.778 h1.6
  text "BREQ#" at 34.666,-55.778 h1.6
  text "BACK#" at 45.588,-55.778 h1.6
  text "BREQ#" at 54.666,-55.778 h1.6
  text "BACK#" at 65.588,-55.778 h1.6
  text "M1#" at 102.853,-58.293 h1.6
  text "M1#" at 128.253,-58.293 h1.6
  text "M1#" at 153.653,-58.293 h1.6
  text "FCPU" at 15.682,-58.318 h1.6
  text "INST#" at 25.588,-58.318 h1.6
  text "FCPU" at 35.682,-58.318 h1.6
  text "INST#" at 45.588,-58.318 h1.6
  text "FCPU" at 55.682,-58.318 h1.6
  text "INST#" at 65.588,-58.318 h1.6
  text "*" at 95.771,-58.918 h2.5
  text "*" at 121.171,-58.918 h2.5
  text "*" at 146.571,-58.918 h2.5
  text "+5V" at 102.853,-60.833 h1.6
  text "+5V" at 128.253,-60.833 h1.6
  text "+5V" at 153.653,-60.833 h1.6
  text "WR#" at 16.19,-60.858 h1.6
  text "RD#" at 25.588,-60.858 h1.6
  text "WR#" at 36.19,-60.858 h1.6
  text "RD#" at 45.588,-60.858 h1.6
  text "WR#" at 56.19,-60.858 h1.6
  text "RD#" at 65.588,-60.858 h1.6
  text "GND" at 102.853,-63.373 h1.6
  text "GND" at 128.253,-63.373 h1.6
  text "GND" at 153.653,-63.373 h1.6
  text "IO#" at 17.206,-63.398 h1.6
  text "MEM#" at 25.588,-63.398 h1.6
  text "IO#" at 37.206,-63.398 h1.6
  text "MEM#" at 45.588,-63.398 h1.6
  text "IO#" at 57.206,-63.398 h1.6
  text "MEM#" at 65.588,-63.398 h1.6
  text "A16" at 94.107,-65.913 h1.6
  text "A0" at 102.853,-65.913 h1.6
  text "A16" at 119.507,-65.913 h1.6
  text "A0" at 128.253,-65.913 h1.6
  text "A16" at 144.907,-65.913 h1.6
  text "A0" at 153.653,-65.913 h1.6
  text "A23" at 16.698,-65.938 h1.6
  text "A22" at 25.588,-65.938 h1.6
  text "A23" at 36.698,-65.938 h1.6
  text "A22" at 45.588,-65.938 h1.6
  text "A23" at 56.698,-65.938 h1.6
  text "A22" at 65.588,-65.938 h1.6
  text "A17" at 94.107,-68.453 h1.6
  text "A1" at 102.853,-68.453 h1.6
  text "A17" at 119.507,-68.453 h1.6
  text "A1" at 128.253,-68.453 h1.6
  text "A17" at 144.907,-68.453 h1.6
  text "A1" at 153.653,-68.453 h1.6
  text "A21" at 16.698,-68.478 h1.6
  text "A20" at 25.588,-68.478 h1.6
  text "A21" at 36.698,-68.478 h1.6
  text "A20" at 45.588,-68.478 h1.6
  text "A21" at 56.698,-68.478 h1.6
  text "A20" at 65.588,-68.478 h1.6
  text "A18" at 94.107,-70.993 h1.6
  text "A2" at 102.853,-70.993 h1.6
  text "A18" at 119.507,-70.993 h1.6
  text "A2" at 128.253,-70.993 h1.6
  text "A18" at 144.907,-70.993 h1.6
  text "A2" at 153.653,-70.993 h1.6
  text "A19" at 16.698,-71.018 h1.6
  text "A18" at 25.588,-71.018 h1.6
  text "A19" at 36.698,-71.018 h1.6
  text "A18" at 45.588,-71.018 h1.6
  text "A19" at 56.698,-71.018 h1.6
  text "A18" at 65.588,-71.018 h1.6
  text "TO Z20X EXPANSION CONNECTOR" at 7.808,-73.05 h2.5 r90
  text "A19" at 94.107,-73.533 h1.6
  text "A3" at 102.853,-73.533 h1.6
  text "A19" at 119.507,-73.533 h1.6
  text "A3" at 128.253,-73.533 h1.6
  text "A19" at 144.907,-73.533 h1.6
  text "A3" at 153.653,-73.533 h1.6
  text "A17" at 16.698,-73.558 h1.6
  text "A16" at 25.588,-73.558 h1.6
  text "A17" at 36.698,-73.558 h1.6
  text "A16" at 45.588,-73.558 h1.6
  text "A17" at 56.698,-73.558 h1.6
  text "A16" at 65.588,-73.558 h1.6
  text "A20" at 94.107,-76.073 h1.6
  text "A4" at 102.853,-76.073 h1.6
  text "A20" at 119.507,-76.073 h1.6
  text "A4" at 128.253,-76.073 h1.6
  text "A20" at 144.907,-76.073 h1.6
  text "A4" at 153.653,-76.073 h1.6
  text "A15" at 16.698,-76.098 h1.6
  text "A14" at 25.588,-76.098 h1.6
  text "A15" at 36.698,-76.098 h1.6
  text "A14" at 45.588,-76.098 h1.6
  text "A15" at 56.698,-76.098 h1.6
  text "A14" at 65.588,-76.098 h1.6
  text "A21" at 94.107,-78.613 h1.6
  text "A5" at 102.853,-78.613 h1.6
  text "A21" at 119.507,-78.613 h1.6
  text "A5" at 128.253,-78.613 h1.6
  text "A21" at 144.907,-78.613 h1.6
  text "A5" at 153.653,-78.613 h1.6
  text "A13" at 16.698,-78.638 h1.6
  text "A12" at 25.588,-78.638 h1.6
  text "A13" at 36.698,-78.638 h1.6
  text "A12" at 45.588,-78.638 h1.6
  text "A13" at 56.698,-78.638 h1.6
  text "A12" at 65.588,-78.638 h1.6
  text "A22" at 94.107,-81.153 h1.6
  text "A6" at 102.853,-81.153 h1.6
  text "A22" at 119.507,-81.153 h1.6
  text "A6" at 128.253,-81.153 h1.6
  text "A22" at 144.907,-81.153 h1.6
  text "A6" at 153.653,-81.153 h1.6
  text "A11" at 16.698,-81.178 h1.6
  text "A10" at 25.588,-81.178 h1.6
  text "A11" at 36.698,-81.178 h1.6
  text "A10" at 45.588,-81.178 h1.6
  text "A11" at 56.698,-81.178 h1.6
  text "A10" at 65.588,-81.178 h1.6
  text "A23" at 94.107,-83.693 h1.6
  text "A7" at 102.853,-83.693 h1.6
  text "A23" at 119.507,-83.693 h1.6
  text "A7" at 128.253,-83.693 h1.6
  text "A23" at 144.907,-83.693 h1.6
  text "A7" at 153.653,-83.693 h1.6
  text "A9" at 17.46,-83.718 h1.6
  text "A8" at 25.588,-83.718 h1.6
  text "A9" at 37.46,-83.718 h1.6
  text "A8" at 45.588,-83.718 h1.6
  text "A9" at 57.46,-83.718 h1.6
  text "A8" at 65.588,-83.718 h1.6
  text "A8" at 102.853,-86.233 h1.6
  text "A8" at 128.253,-86.233 h1.6
  text "A8" at 153.653,-86.233 h1.6
  text "A7" at 17.46,-86.258 h1.6
  text "A6" at 25.588,-86.258 h1.6
  text "A7" at 37.46,-86.258 h1.6
  text "A6" at 45.588,-86.258 h1.6
  text "A7" at 57.46,-86.258 h1.6
  text "A6" at 65.588,-86.258 h1.6
  text "*" at 95.771,-86.858 h2.5
  text "*" at 121.171,-86.858 h2.5
  text "*" at 146.571,-86.858 h2.5
  text "A9" at 102.853,-88.773 h1.6
  text "A9" at 128.253,-88.773 h1.6
  text "A9" at 153.653,-88.773 h1.6
  text "A5" at 17.46,-88.798 h1.6
  text "A4" at 25.588,-88.798 h1.6
  text "A5" at 37.46,-88.798 h1.6
  text "A4" at 45.588,-88.798 h1.6
  text "A5" at 57.46,-88.798 h1.6
  text "A4" at 65.588,-88.798 h1.6
  text "*" at 95.771,-89.398 h2.5
  text "*" at 121.171,-89.398 h2.5
  text "*" at 146.571,-89.398 h2.5
  text "A10" at 102.853,-91.313 h1.6
  text "A10" at 128.253,-91.313 h1.6
  text "A10" at 153.653,-91.313 h1.6
  text "A3" at 17.46,-91.338 h1.6
  text "A2" at 25.588,-91.338 h1.6
  text "A3" at 37.46,-91.338 h1.6
  text "A2" at 45.588,-91.338 h1.6
  text "A3" at 57.46,-91.338 h1.6
  text "A2" at 65.588,-91.338 h1.6
  text "*" at 95.771,-91.938 h2.5
  text "*" at 121.171,-91.938 h2.5
  text "*" at 146.571,-91.938 h2.5
  text "A11" at 102.853,-93.853 h1.6
  text "A11" at 128.253,-93.853 h1.6
  text "A11" at 153.653,-93.853 h1.6
  text "A1" at 17.46,-93.878 h1.6
  text "A0" at 25.588,-93.878 h1.6
  text "A1" at 37.46,-93.878 h1.6
  text "A0" at 45.588,-93.878 h1.6
  text "A1" at 57.46,-93.878 h1.6
  text "A0" at 65.588,-93.878 h1.6
  text "*" at 95.771,-94.478 h2.5
  text "*" at 121.171,-94.478 h2.5
  text "*" at 146.571,-94.478 h2.5
  text "A12" at 102.853,-96.393 h1.6
  text "A12" at 128.253,-96.393 h1.6
  text "A12" at 153.653,-96.393 h1.6
  text "+5V" at 25.588,-96.418 h1.6
  text "+5V" at 45.588,-96.418 h1.6
  text "+5V" at 65.588,-96.418 h1.6
  text "*" at 95.771,-97.018 h2.5
  text "*" at 121.171,-97.018 h2.5
  text "*" at 146.571,-97.018 h2.5
  text "A13" at 102.853,-98.933 h1.6
  text "A13" at 128.253,-98.933 h1.6
  text "A13" at 153.653,-98.933 h1.6
  text "GND" at 25.588,-98.958 h1.6
  text "GND" at 45.588,-98.958 h1.6
  text "GND" at 65.588,-98.958 h1.6
  text "*" at 95.771,-99.558 h2.5
  text "*" at 121.171,-99.558 h2.5
  text "*" at 146.571,-99.558 h2.5
  text "A14" at 102.853,-101.473 h1.6
  text "A14" at 128.253,-101.473 h1.6
  text "A14" at 153.653,-101.473 h1.6
  text "*" at 95.771,-102.098 h2.5
  text "*" at 121.171,-102.098 h2.5
  text "*" at 146.571,-102.098 h2.5
  text "A15" at 102.853,-104.013 h1.6
  text "A15" at 128.253,-104.013 h1.6
  text "A15" at 153.653,-104.013 h1.6
  text "*" at 95.771,-104.638 h2.5
  text "*" at 121.171,-104.638 h2.5
  text "*" at 146.571,-104.638 h2.5
Mechanical 1:
  the board outline again, w0.35